# Altium PCB WearTechPCB.PcbDoc
Units mil, origin at the board's own origin, x right, y up, seen from the top; angles counter-clockwise.
Board outline 2037 x 1814 mil, 2 copper layers (Top Layer, Bottom Layer); 100 components, 54 nets, 292 pads, 46 vias.
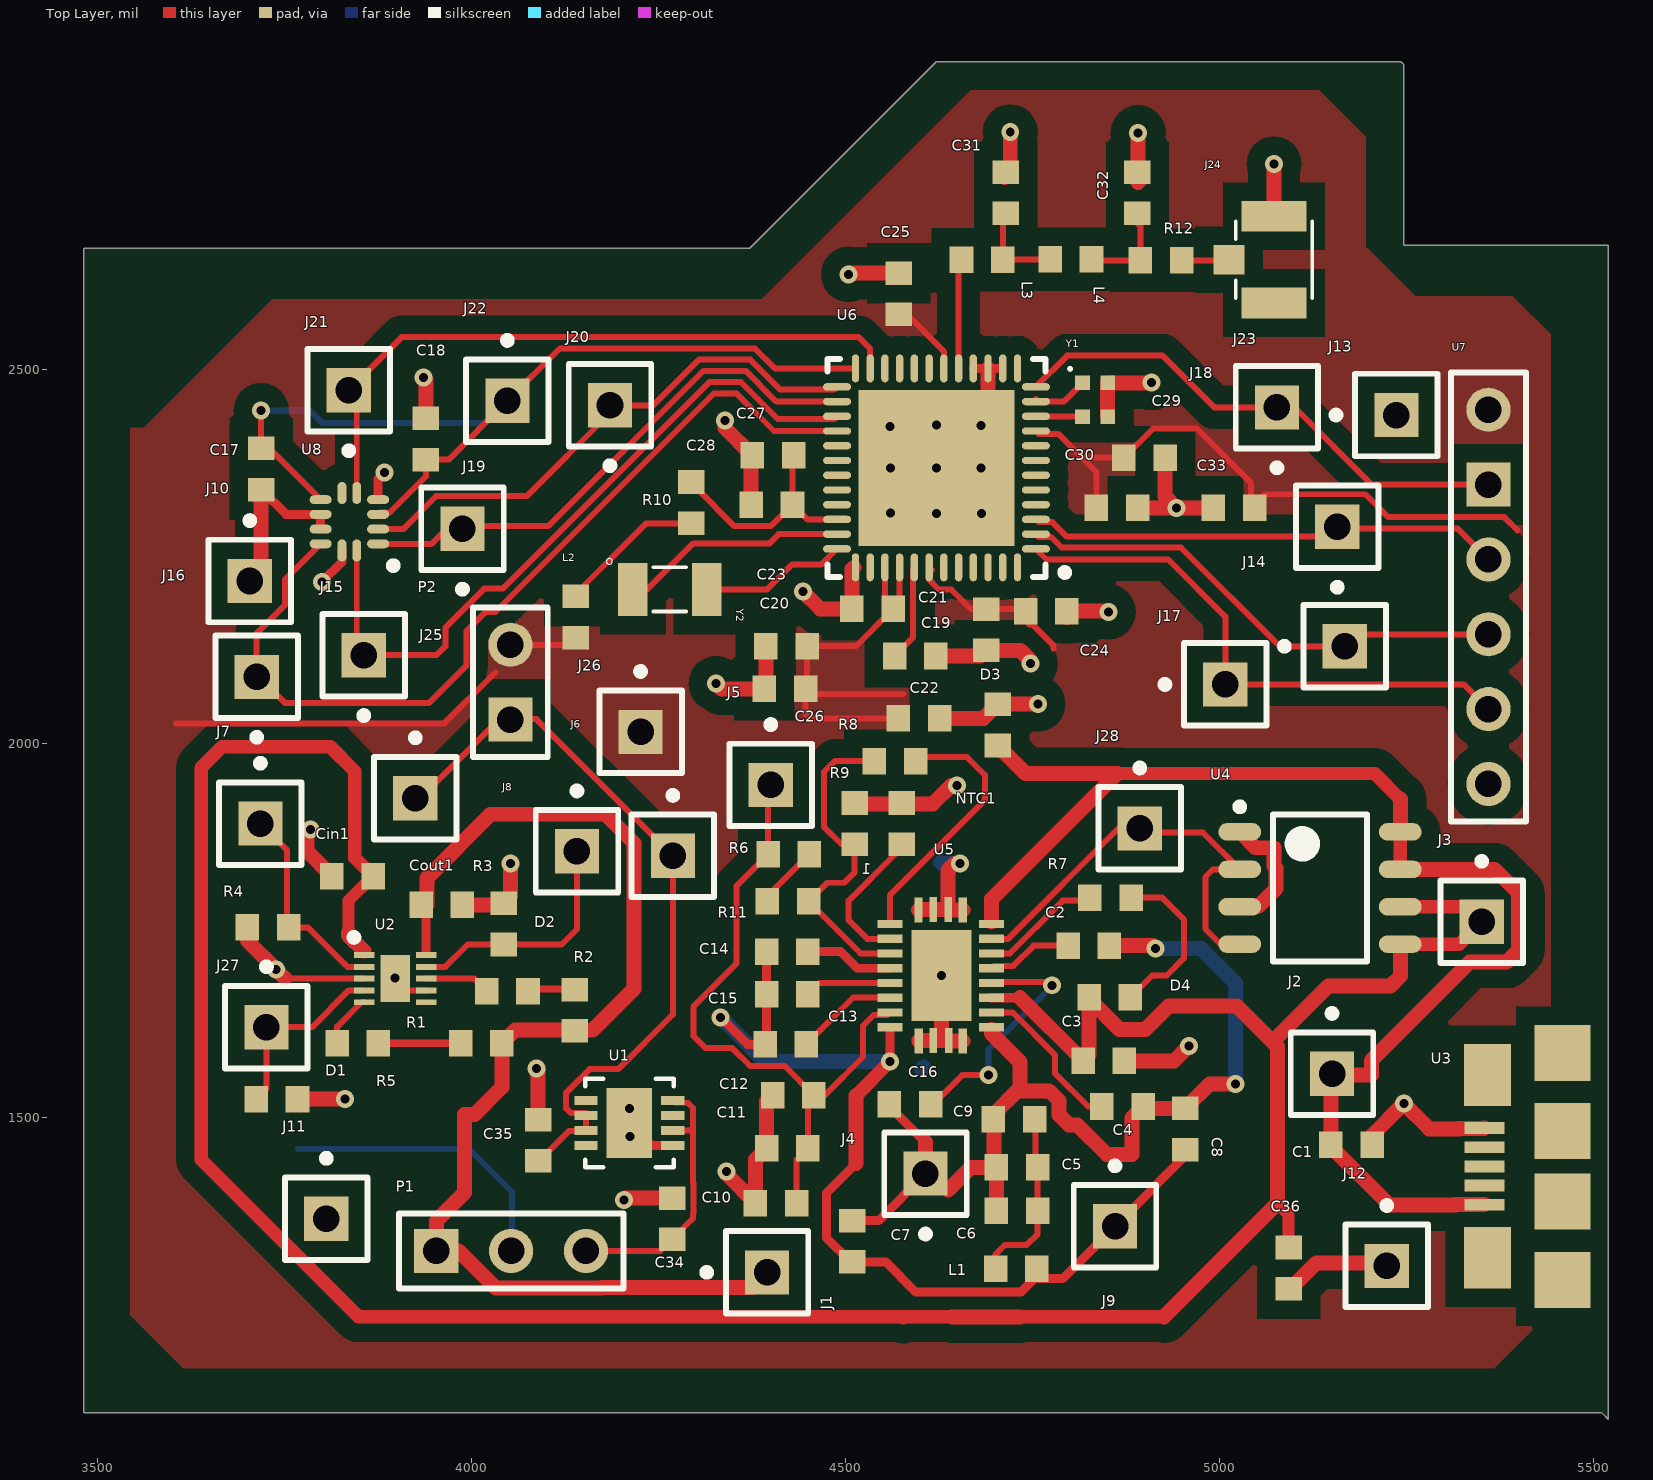
[diagram p0: Top Layer view]
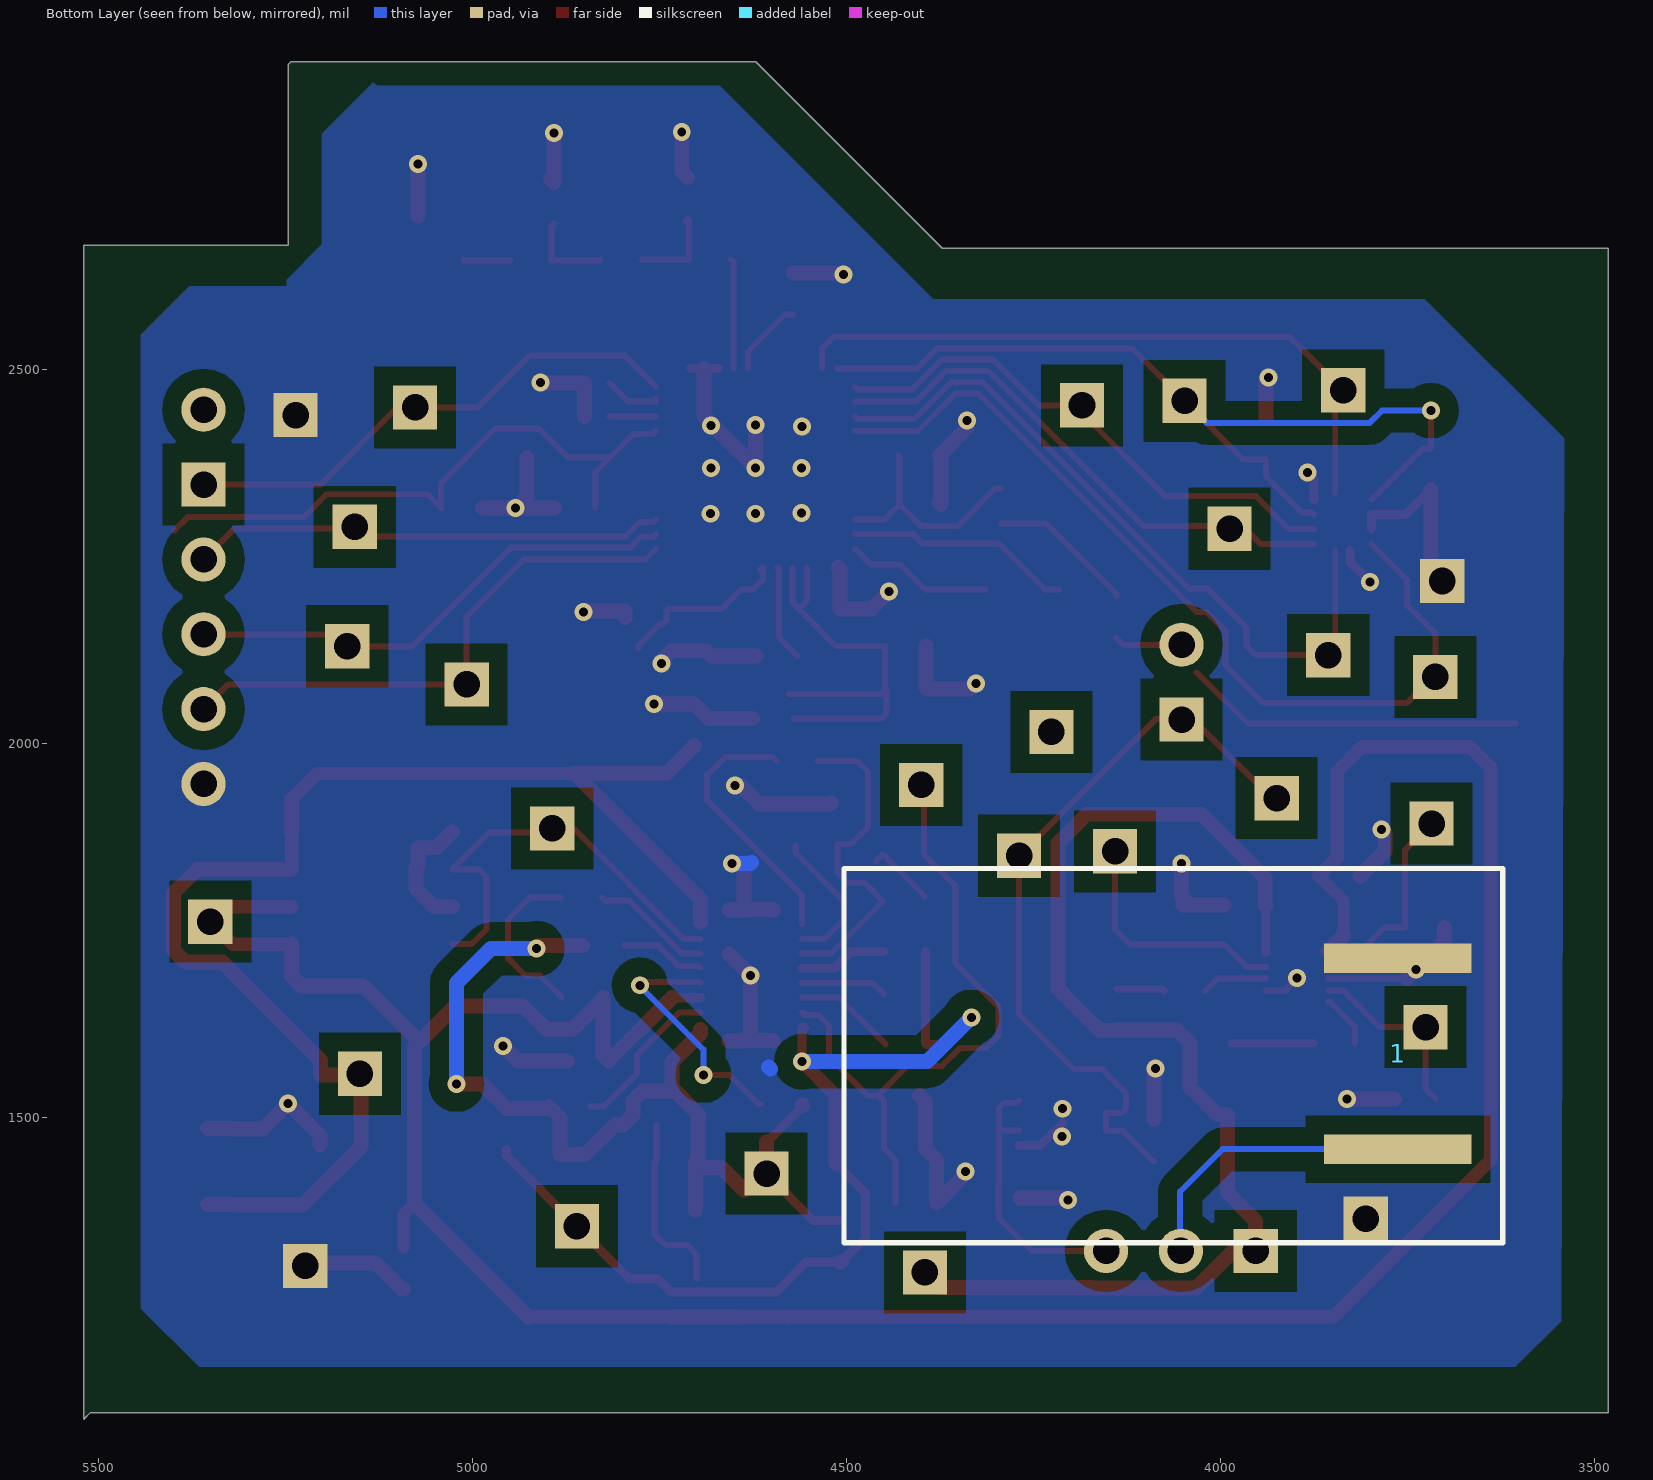
[diagram p1: Bottom Layer view, seen from below]

## Layer stack, top to bottom
Top Solder: solder mask 0.4, Solder Resist, Dk 3.5
Top Layer: signal copper 1.4
Dielectric 1: dielectric 12.6, FR-4, Dk 4.8
Bottom Layer: signal copper 1.4
Bottom Solder: solder mask 0.4, Solder Resist, Dk 3.5

## Board outline
3482,2662 4372,2662 4621,2911 5242,2911 5246,2907 5246,2666 5519,2666 5519,1097 5510,1106 3482,1106

## Design rules (kind name [scope] priority, off if disabled: settings)
Clearance U2 [InComponent('U2') vs InComponent('U2')] p1: gap=10 ignorepadtopadclearanceinfootprint=TRUE except(0: Arc-Hole Track-Hole SMDPad-Hole THPad-Hole Via-Hole Fill-Hole Poly-Hole Region-Hole Text-Hole; 4: Track-Track Track-SMDPad Track-THPad SMDPad-THPad THPad-THPad; 8: Arc-SMDPad SMDPad-SMDPad; 15: Track-Via SMDPad-Via THPad-Via Via-Via; 20: Arc-Via; 25: Arc-Poly Track-Poly SMDPad-Poly THPad-Poly Via-Poly Fill-Poly Poly-Poly)
Clearance Clearance_1 [InComponent('U6') vs InComponent('U6')] p2: gap=10 ignorepadtopadclearanceinfootprint=TRUE except(0: Arc-Hole Track-Hole SMDPad-Hole THPad-Hole Via-Hole Fill-Hole Poly-Hole Region-Hole Text-Hole; 7: Track-Track Track-SMDPad; 8: Arc-SMDPad SMDPad-SMDPad; 15: Track-Via SMDPad-Via THPad-Via Via-Via; 20: Arc-Via; 25: Arc-Poly Track-Poly SMDPad-Poly THPad-Poly Via-Poly Fill-Poly Poly-Poly)
Clearance IC_Pin_Clear [InComponent('U5')Or  InComponent('U1') vs InComponent('U5')Or  InComponent('U1')] p3: gap=10 ignorepadtopadclearanceinfootprint=TRUE except(0: Arc-Hole Track-Hole SMDPad-Hole THPad-Hole Via-Hole Fill-Hole Poly-Hole Region-Hole Text-Hole; 2: SMDPad-Region THPad-Region; 5: Arc-Region Track-Track Track-SMDPad Track-THPad Track-Region; 6: SMDPad-SMDPad; 8: Arc-SMDPad SMDPad-THPad THPad-THPad Poly-Region; 15: SMDPad-Via THPad-Via; 20: Arc-Via Track-Via Via-Via; 25: Arc-Poly Track-Poly SMDPad-Poly THPad-Poly Via-Poly Fill-Poly Poly-Poly)
Clearance [All] p4: gap=10 ignorepadtopadclearanceinfootprint=TRUE except(0: Arc-Hole Track-Hole SMDPad-Hole THPad-Hole Via-Hole Fill-Hole Poly-Hole Region-Hole Text-Hole; 7: Track-Track Track-SMDPad; 8: Arc-SMDPad SMDPad-SMDPad; 20: Arc-Via Track-Via SMDPad-Via THPad-Via Via-Via; 25: Arc-Poly Track-Poly SMDPad-Poly THPad-Poly Via-Poly Fill-Poly Poly-Poly)
MinimumSolderMaskSliver MinimumSolderMaskSliver_1 [(InComponent('U5') OR InComponent('U6') OR InComponent('U2') OR InComponent('U1')  OR InComponent('U3') OR InComponent('U8')  OR InComponent('J24')OR InComponent('Y1')) vs (InComponent('U5') OR InComponent('U6') OR InComponent('U2') OR InComponent('U1')  OR InComponent('U3') OR InComponent('U8')  OR InComponent('J24')OR InComponent('Y1'))] p1: minsoldermaskwidth=1.77
MinimumSolderMaskSliver [All] p2: minsoldermaskwidth=10
PlaneConnect [HasFootprint('QFN50P700X700X90_HS-49N')] p1 off: planeconnectstyle=NoConnect reliefexpansion=20 reliefentries=4 reliefconductorwidth=10 reliefairgap=10
PlaneConnect PlaneConnect_1 [All] p2: planeconnectstyle=Relief reliefexpansion=20 reliefentries=4 reliefconductorwidth=10 reliefairgap=10
PolygonConnect [All] p1: connectstyle=Direct reliefconductorwidth=10 reliefentries=4 polygonreliefangle="90 Angle" airgapwidth=10
RoutingVias [All] p1: holewidth=12 width=24 viastyle="Through Hole" minholewidth=10 minwidth=20 maxholewidth=14 maxwidth=28
SilkToSolderMaskClearance [InComponent('U1')Or  InComponent('Y2') Or InComponent('Y1')Or  InComponent('U2') Or InComponent('J24')Or  InComponent('P1')Or  InComponent('J1') Or InComponent('J11')Or InComponent('J8') Or InComponent('J6')] p1: minsilkscreentomaskgap=2 clearancetoexposedcopper=TRUE
SilkToSolderMaskClearance SilkToSolderMaskClearance_1 [IsPad] p2: minsilkscreentomaskgap=10 clearancetoexposedcopper=TRUE
SolderMaskExpansion [All] p1: expansion=4
Width Power [(InNet('+5V') OR InNet('GND') OR InNet('VBUS') OR InNet('VIN') OR InNet('SOURCE1') OR InNet('BAT2')OR InNet('NetC2_2') OR InNet('NetC7_2'))] p1: maxlimit=20 minlimit=8 preferedwidth=20
Width Signal [All] p2: maxlimit=12 minlimit=8 preferedwidth=8
27 further rules are at their usual default settings.

## Components (designator, comment, footprint, x,y, rotation, side; value= is the part's Value field where it differs from the comment)
1 "SolderPad" BATTERY_CONNECTION 3773,1608 r180 bottom
C1 "Cap" 1608[0603] 5176,1464 r180 top value=1uF
C2 "Cap" 1608[0603] 4825,1730 r0 top value=22nF
C3 "Cap" 1608[0603] 4844.94,1575.97 r0 top value=10uF
C4 "Cap" 1608[0603] 4870,1515 r0 top value=10nF
C5 "Cap" 1608[0603] 4729,1434 r0 top value=68nF
C6 "Cap" 1608[0603] 4729,1376 r0 top value=47nF
C7 "Cap" 1608[0603] 4509,1335 r270 top value=2.2nF
C8 "Cap" 1608[0603] 4954,1485 r270 top value=100pF
C9 "Cap" 1608[0603] 4725,1498 r0 top value=39nF
C10 "Cap" 1608[0603] 4407,1386 r180 top value=10uF
C11 "Cap" 1608[0603] 4422,1459 r180 top value=0.1uF
C12 "Cap" 1608[0603] 4430,1530 r180 top value=10uF
C13 "Cap" 1608[0603] 4420,1598 r180 top value=10nF
C14 "Cap" 1608[0603] 4422,1722 r180 top value=22nF
C15 "Cap" 1608[0603] 4422,1664.74 r180 top value=0.47uF
C16 "Cap" 1608[0603] 4586,1518 r180 top value=0.47uF
C17 "Cap" 1608[0603] 3719,2367 r90 top value=100nF
C18 "Cap" 1608[0603] 3939,2407 r270 top value=100nF
C19 "Cap" 1608[0603] 4593,2117 r180 top value=1uF
C20 "Cap" 1608[0603] 4421,2130.26 r0 top value=0.1uF
C21 "Cap" 1608[0603] 4688,2152 r90 top value=10uF
C22 "Cap" 1608[0603] 4598,2033.75 r180 top value=0.1uF
C23 "Cap" 1608[0603] 4536,2180 r0 top value=10uF
C24 "Cap" 1608[0603] 4768,2177 r180 top
C25 "Cap" 1608[0603] 4571,2601 r270 top value=220nF
C26 "Cap" 1608[0603] 4419,2073 r0 top value=10pF
C27 "Cap" 1608[0603] 4403,2385 r0 top value=10nF
C28 "Cap" 1608[0603] 4401.42,2319.42 r0 top value=10uF
C29 "Cap" 1608[0603] 4899.44,2382 r180 top value=220nF
C30 "Cap" 1608[0603] 4862.56,2315 r180 top value=10pF
C31 "Cap" 1608[0603] 4714,2736 r270 top value=2.0pF
C32 "Cap" 1608[0603] 4890,2736 r270 top value=1.0pF
C33 "Cap" 1608[0603] 5019,2315 r0 top value="0.1 uF"
C34 "Cap" 1608[0603] 4268,1365 r90 top value=10uF
C35 "Cap" 1608[0603] 4089,1470 r90 top value=10uF
C36 "Cap" 1608[0603] 5092,1299 r270 top value=0.1uF
Cin1 "Cap" 1608[0603] 3841,1823 r180 top value=1uF
Cout1 "Cap" 1608[0603] 3960.35,1784.44 r0 top value=10uF
D1 "LED0" 1608[0603] 3848,1599.44 r180 top
D2 "LED0" 1608[0603] 4048,1669.31 r180 top
D3 "Diode" 1608[0603] 4703,2025 r90 top
D4 "LED0" 1608[0603] 4852.94,1660.97 r0 top
J1 "Socket" PIN1 4395,1293.31 r90 top
J2 "Socket" PIN1 5150,1558.69 r0 top
J3 "Socket" PIN1 5349.94,1761.97 r0 top
J4 "Socket" PIN1 4606.69,1425.28 r180 top
J5 "Socket" PIN1 4400,1944.69 r0 top
J6 "Socket" PIN1 4269.12,1850 r0 top
J7 "Socket" PIN1 3718,1893 r0 top
J8 "Socket" PIN1 4141,1856 r0 top
J9 "Socket" PIN1 4860,1355 r0 top
J10 "Socket" PIN1 3703.82,2217.23 r0 top
J11 "Socket" PIN1 3806,1365 r0 top
J12 "Socket" PIN1 5223,1302 r0 top
J13 "Socket" PIN1 5236,2439 r90 top
J14 "Socket" PIN1 5167,2130 r90 top
J15 "Socket" PIN1 3856,2118.11 r180 top
J16 "Socket" PIN1 3713,2089.11 r180 top
J17 "Socket" PIN1 5007.38,2079 r90 top
J18 "Socket" PIN1 5157,2289.62 r180 top
J19 "Socket" PIN1 3988,2287 r180 top
J20 "Socket" PIN1 4185.12,2452 r180 top
J21 "Socket" PIN1 3836,2472 r180 top
J22 "Socket" PIN1 4048,2458 r0 top
J23 "Socket" PIN1 5076.38,2449.23 r180 top
J24 "U.FL-R-SMT-(10)" "Antenna Connector" 5072.42,2646.58 r270 top
J25 "Socket" PIN1 3925,1927 r0 top
J26 "Socket" PIN1 4226,2015.62 r0 top
J27 "Socket" PIN1 3726,1621 r0 top
J28 "Socket" PIN1 4893,1886.69 r0 top
L1 "Inductor" 1608[0603] 4728,1298 r180 top value=10mH
L2 "Ferrite_Bead" 1608[0603] 4139.57,2169 r270 top
L3 "Inductor" 1608[0603] 4682.42,2646.58 r0 top value=1.8nH
L4 "Inductor" 1608[0603] 4801,2647 r0 top value=3.0nH
NTC1 "Res Thermal" 1608[0603] 4575,1893 r90 top value=10k
P1 "Header 3" HDR1X3 3953,1322 r0 top
P2 "Header 2" HDR1X2 4052,2032 r90 top
R1 "Res1" 1608[0603] 4013,1599.44 r0 top value=1.5K
R2 "Res1" 1608[0603] 4138,1643.72 r90 top value=1.5K
R3 "Res1" 1608[0603] 4043.19,1759 r270 top value=250K
R4 "Res1" 1608[0603] 3728,1754.44 r180 top value=12k
R5 "Res1" 1608[0603] 3740,1525 r0 top value=2K
R6 "Res1" 1608[0603] 4424,1852 r0 top value=10K
R7 "Res1" 1608[0603] 4854,1794 r180 top value=1.5K
R8 "Res1" 1608[0603] 4565.94,1976.49 r180 top value=66
R9 "Res1" 1608[0603] 4512,1893 r90 top value=196
R10 "Res1" 1608[0603] 4293.42,2321.94 r270 top value=1ohm
R11 "Res1" 1608[0603] 4422.94,1788.97 r180 top value=10K
R12 "Res1" 1608[0603] 4921.42,2645.58 r180 top value=0
U1 "LT1965EDD-2.5PBF" LT1965 4211,1493 r0 top
U2 "BQ24040" BQ24040 3898,1685.85 r0 top
U3 "MICRO_USB" "MICRO USB" 5515,1435 r90 top
U4 "TPS1120_D_8" BLOCKSWITCH 5133.94,1806.97 r0 top value=Value
U5 "BQ51013B" BQ51013B 4698.94,1597.97 r90 top
U6 "MCU" QFN50P700X700X90_HS-49N 4621.42,2368.42 r180 top
U7 "DEBUG HEADER" HDR1X6 5359,1946 r90 top
U8 "BMA280" QFN50P200X200X100-12N 3836.86,2296.42 r180 top
Y1 "X1" X1 4833.42,2459.42 r0 top
Y2 "X2" X2 4267,2208 r0 top

## Footprints (in the part's own frame and the unit in brackets; to place one, negate y for a bottom-side part, rotate by r counter-clockwise, add the part's x,y. Pads: shape width x height; smd on the part's side, far side on the other; paste and mask are expansions set on the pad)
1608[0603] [mm] "Chip Capacitor, Body 1.6x0.8mm, IPC High Density"
  rect 0.8x0.9 smd: 1(-0.7,0) 2(0.7,0)
  body extent -0.87,-0.48 0.87,0.48, height 1.3
"Antenna Connector" [mm]
  rect 1.05x2.2 smd: GND1(-1.475,0) GND2(1.475,0)
  rect 1x1.05 smd: SIG(0,-1.525)
  silkscreen extent -1.3,-1.3 1.3,1.3
BATTERY_CONNECTION [mm]
  rect 5x1 smd: 1(0.254,-3.81) 2(0.254,2.667)
  silkscreen extent -18.54,-6.98 3.81,5.72
BLOCKSWITCH [mm] "SOIC, 8-Leads, Body 4.90x3.90mm, Pitch 1.27mm, IPC Medium Density"
  oval 1.45x0.6 smd: 1(-2.725,1.905) 2(-2.725,0.635) 3(-2.725,-0.635) 4(-2.725,-1.905) 5(2.725,-1.905) 6(2.725,-0.635) 7(2.725,0.635) 8(2.725,1.905)
  silkscreen extent -2.85,-2.5 1.6,2.88, body extent -2,-2.5 2,2.5, height 1.75
BQ24040 [mm]
  rect 0.7x0.2 smd mask+0.05: 1(-1.05,0.8) 2(-1.05,0.4) 3(-1.05,0) 4(-1.05,-0.4) 5(-1.05,-0.8) 6(1.05,-0.8) 7(1.05,-0.4) 8(1.05,0) 9(1.05,0.4) 10(1.05,0.8)
  rect 1x1.6 smd: 11(0,0)
  silkscreen extent -1.52,1.28 -1.27,1.52
BQ51013B [mm]
  rect 0.85x0.28 smd mask+0.05: 1(0.113,1.074) 10(4.56,1.076) 11(4.56,2.576) 20(0.113,2.571)
  rect 0.28x0.85 smd mask+0.05: 2(0.585,0.1) 3(1.085,0.1) 4(1.585,0.1) 5(2.085,0.1) 6(2.585,0.1) 7(3.085,0.1) 8(3.585,0.1) 9(4.085,0.1) 12(4.085,3.55) 13(3.585,3.55) 14(3.085,3.55) 15(2.585,3.55) 16(2.085,3.55) 17(1.585,3.55) 18(1.085,3.55) 19(0.585,3.55)
  rect 0.85x0.25 smd mask+0.05: 21(0.127,2.083) 22(0.127,1.549) 23(4.572,2.083) 24(4.572,1.575)
  rect 3.099x2.032 smd mask+0.05: 21(2.337,1.803)
HDR1X2 [mm] "Connector; Header; 2 Position"
  rect 1.5x1.5 hole 0.9: 1(0,0)
  round 1.5 hole 0.9: 2(2.54,0)
  silkscreen extent -1.27,-1.27 3.81,1.27
HDR1X3 [mm] "Connector; Header; 3 Position"
  rect 1.5x1.5 hole 0.9: 1(0,0)
  round 1.5 hole 0.9: 2(2.54,0) 3(5.08,0)
  silkscreen extent -1.27,-1.27 6.35,1.27
HDR1X6 [mm] "Connector; Header; 6 Position"
  rect 1.5x1.5 hole 0.9: 1(10.16,0)
  round 1.5 hole 0.9: 2(2.54,0) 3(5.08,0) 4(7.62,0) 5(12.7,0) 6(0,0)
  silkscreen extent -1.27,-1.27 13.97,1.27
LT1965 [mil]
  rect 31x12 smd: 1(-58,30) 2(-58,10) 3(-58,-10) 4(-58,-30) 5(58,-30) 6(58,-10) 7(58,10) 8(58,30)
  rect 61x94 smd: 9(0,0)
  silkscreen extent -59,-59 59,59
"MICRO USB" [mm]
  rect 0.4x1.35 smd: 1(-1.3,4.1) 2(-0.65,4.1) 3(0,4.1) 4(0.65,4.1) 5(1.3,4.1)
  rect 1.9x1.9 smd: M1(-1.2,1.45) M2(1.2,1.45) S1(-3.85,1.45) S2(3.85,1.45)
  rect 2.1x1.6 smd: S3(-3.1,4) S4(3.1,4)
PIN1 [mm] "Connector; Plug"
  rect 1.5x1.5 hole 0.9: 1(0,0)
  silkscreen extent -1.4,-1.4 1.4,2.17
QFN50P200X200X100-12N [mm] "QFN, 12-Leads, Body 2.00x2.00mm, Pitch 0.50mm, IPC Medium Density"
  oval 0.75x0.3 smd: 1(-0.975,0.75) 2(-0.975,0.25) 3(-0.975,-0.25) 4(-0.975,-0.75) 7(0.975,-0.75) 8(0.975,-0.25) 9(0.975,0.25) 10(0.975,0.75)
  oval 0.3x0.75 smd: 5(-0.25,-0.975) 6(0.25,-0.975) 11(0.25,0.975) 12(-0.25,0.975)
  silkscreen extent -1.62,1.37 -1.37,1.61, body extent -1.04,-1.04 1.04,1.04, height 1
QFN50P700X700X90_HS-49N [mm] "QFN, 48-Leads, Body 7.00x7.00mm, Pitch 0.50mm, Thermal Pad 5.30x5.30mm, IPC Medium Density"
  rect 5.3x5.3 smd: 0(0,0)
  oval 0.95x0.25 smd: 1(-3.375,2.75) 2(-3.375,2.25) 3(-3.375,1.75) 4(-3.375,1.25) 5(-3.375,0.75) 6(-3.375,0.25) 7(-3.375,-0.25) 8(-3.375,-0.75) 9(-3.375,-1.25) 10(-3.375,-1.75) 11(-3.375,-2.25) 12(-3.375,-2.75) 25(3.375,-2.75) 26(3.375,-2.25) 27(3.375,-1.75) 28(3.375,-1.25) 29(3.375,-0.75) 30(3.375,-0.25) 31(3.375,0.25) 32(3.375,0.75) 33(3.375,1.25) 34(3.375,1.75) 35(3.375,2.25) 36(3.375,2.75)
  oval 0.25x0.95 smd: 13(-2.75,-3.375) 14(-2.25,-3.375) 15(-1.75,-3.375) 16(-1.25,-3.375) 17(-0.75,-3.375) 18(-0.25,-3.375) 19(0.25,-3.375) 20(0.75,-3.375) 21(1.25,-3.375) 22(1.75,-3.375) 23(2.25,-3.375) 24(2.75,-3.375) 37(2.75,3.375) 38(2.25,3.375) 39(1.75,3.375) 40(1.25,3.375) 41(0.75,3.375) 42(0.25,3.375) 43(-0.25,3.375) 44(-0.75,3.375) 45(-1.25,3.375) 46(-1.75,3.375) 47(-2.25,3.375) 48(-2.75,3.375)
  silkscreen extent -4.47,-3.7 3.7,3.7, body extent -3.55,-3.55 3.55,3.55, height 0.9
X1 [mm]
  rect 0.5x0.5 smd: 1(-0.425,0.575) 2(-0.425,-0.575) 3(0.425,-0.575) 4(0.425,0.575)
  silkscreen extent -0.9,1 -0.8,1.1, body extent -0.85,-0.65 0.85,0.65, height 0.65
X2 [mm]
  rect 1x1.8 smd: 1(-1.301,-0.051) 2(1.199,-0.051)
  silkscreen extent -2.2,-0.8 0.5,1

## Part data
C1 C2 C3 C4 C5 C6 C7 C8 C9 C10 C11 C12 C13 C14 C15 C16 C17 C18 C19 C20 C21 C22 C23 C24 C25 C26 C27 C28 C29 C30 C31 C32 C33 C34 C35 C36 Cin1 Cout1: "Capacitor"
  C1: Link=http://psearch.en.murata.com/browser/nosupport/?return=capacitor/product/GRM188R61E105KAAD%23.html
  C2: LatestRevisionDate=17-Jul-2002, LatestRevisionNote="Re-released for DXP Platform.", Link=http://psearch.en.murata.com/capacitor/product/GRM188B11E223MA01%23.html, PackageDescription="Radial Cap, Thru-Hole; 2 Leads; 0.3 in Pin Spacing", PackageReference=RAD-0.3, Published=8-Jun-2000, Publisher="Altium Limited"
  C3 C5 C6 C7 C8 C9 C10 C11 C12 C13 C14 C15 C16 C17 C18 C19 C20 C21 C22 C23 C25 C26 C27 C28 C29 C30 C31 C32 C33 C34 C35 C36 Cin1 Cout1: LatestRevisionDate=17-Jul-2002, LatestRevisionNote="Re-released for DXP Platform.", PackageDescription="Radial Cap, Thru-Hole; 2 Leads; 0.3 in Pin Spacing", PackageReference=RAD-0.3, Published=8-Jun-2000, Publisher="Altium Limited"
  C4: LatestRevisionDate=17-Jul-2002, LatestRevisionNote="Re-released for DXP Platform.", Link=http://psearch.en.murata.com/capacitor/product/GRM185R61E105MA12%23.html, PackageDescription="Radial Cap, Thru-Hole; 2 Leads; 0.3 in Pin Spacing", PackageReference=RAD-0.3, Published=8-Jun-2000, Publisher="Altium Limited"
  C24: Ciovdd1=0.1uF, LatestRevisionDate=17-Jul-2002, LatestRevisionNote="Re-released for DXP Platform.", PackageDescription="Radial Cap, Thru-Hole; 2 Leads; 0.3 in Pin Spacing", PackageReference=RAD-0.3, Published=8-Jun-2000, Publisher="Altium Limited"
D1 D2 D4: "Typical INFRARED GaAs LED", LatestRevisionDate=08-Jul-2005, LatestRevisionNote="Mech Layer 1 removed.", PackageDescription="LED; 2 Leads", PackageReference=LED-0, Published=8-Jun-2000, Publisher="Altium Limited"
D3: "Default Diode", Link=https://www.digikey.com/product-detail/en/SMF05CT1G/SMF05CT1GOSCT-ND/1967287
NTC1: "Thermistor", Code_IPC=RESC2012, LatestRevisionDate=29-May-2009, LatestRevisionNote="IPC-7351 Footprint Added.", PackageDescription="Chip Resistor 0805 Case Size", PackageReference=6-0805, PackageVersion=Mar-2003, Published=24-Mar-1999, Publisher="Altium Limited"
P1: "Header, 3-Pin", LatestRevisionDate=17-Jul-2002, LatestRevisionNote="Re-released for DXP Platform.", Publisher="Altium Limited"
P2: "Header, 2-Pin", LatestRevisionDate=17-Jul-2002, LatestRevisionNote="Re-released for DXP Platform.", Publisher="Altium Limited"
R1 R2 R3 R4 R5 R6 R7 R8 R9 R10 R11 R12: "Resistor", LatestRevisionDate=17-Jul-2002, LatestRevisionNote="Re-released for DXP Platform.", PackageDescription="Axial Device, Thru-Hole; 2 Leads; 0.3 in Pin Spacing", PackageReference=AXIAL-0.3, Published=8-Jun-2000, Publisher="Altium Limited"
U1: "PMIC - LDO voltage regulator Linear Technology LT1965EDD-2.5#PBF Positive, fixed DFN 8 (3x3)", Package="DFN-8 Linear Technology", Availability=Warning, MF="Linear Technology", MP=LT1965EDD-2.5#PBF, Price="2.66 USD"
U4: Manufacturer="Texas Instruments", Manufacturer_Part_Number=tps1120_d_8, PACKAGE_DESIGNATOR=D, Datasheet_URL=http://www.ti.com/lit/gpn/TPS1120, FAMILY_NAME="PMOS SWITCH", GENERIC_PART_NUMBER=TPS1120, INDUSTRY_STD_PKG_TYPE=SOIC, PIN_COUNT=8, RefDes=RefDes, Type=Type, Vendor="Texas Instruments"
J1 J2 J3 J4 J5 J6 J7 J8 J9 J10 J11 J12 J13 J14 J15 J16 J17 J18 J19 J20 J21 J22 J23 J25 J26 J27 J28: LatestRevisionDate=17-Jul-2002, LatestRevisionNote="Re-released for DXP Platform.", Publisher="Altium Limited"
L1 L3 L4: Code_IEC=1005, Code_JEITA=0402, LatestRevisionDate=29-May-2009, LatestRevisionNote="IPC-7351 Footprint Added.", PackageDescription="Chip Inductor", PackageReference=0402-A, Published=8-Jun-2000, Publisher="Altium Limited"

## Via types
v1: diameter 24, hole 12, Top Layer to Bottom Layer, 46 vias

## Nets (pads, with @x,y where several pads share a name; then routed paths per layer and width w, separated by ;. In a path a pad name is that pad's centre, name@x,y a point inside that pad or via, vN(x,y) a via of type N, cw(c..) or ccw(c..) an arc to the next point about the centre after c; other vN are vias at no path point)
BAT: 1.1 P1.2 | length 389.3
  Bottom Layer w8: 1.1@3768,1458 3997.44,1458 4054,1401.44 4054,1323 P1.2
BAT2: Cout1.1 J1.1 P1.1 R1.2 R2.1 U2.10 | length 1622
  Top Layer w12.01: U2.10@3939.34,1720.94 Cout1.1@3939.34,1783.34
  Top Layer w20: Cout1.1@3939.34,1783.34 3940.44,1784.44 3940.44,1820.44 4025.53,1905.53 4178.81,1905.53 4217,1867.34 4217,1672 4161.88,1616.88 4138,1616.88 4137.88,1617 4058.12,1617 R1.2 4040.56,1540.56 4004,1504 3991,1504 3991,1400 3953,1362 P1.1 3982.96,1322 4032.49,1272.47 4173.52,1272.47 4174.04,1273 4374.69,1273 J1.1
GATE: J28.1 U4.2 U4.4 U5.8 | length 588.7
  Top Layer w8: U5.8 4717.11,1739.11 4864,1886 4893,1886 4898,1881 4977.62,1881 U4.2 4990.94,1831.97 4980.94,1821.97 4980.94,1751.97 5000.94,1731.97 U4.4
GND: 1.2 C1.1 C3.2 C10.2 C11.2 C12.2 C17.1 C18.1 C19.1 C20.1 C21.1 C22.1 C23.1 C24.1 C25.1 C26.1 C27.1 C28.1 C29.1 C30.1 C31.1 C32.1 C33.1 C34.2 C35.2 C36.2 Cin1.2 Cout1.2 D3.2 J10.1 J11.1 J12.1 J13.1 J24.GND1 NTC1.2 R3.1 R4.2 R5.2 R9.2 U1.5 U1.9 U2.3 U2.7 U2.11 U3.5 U5.1 U5.10 U5.11 U5.20 U5.21 U5.22 U5.23 U5.24 U6.0 U6.14 U6.15 U6.16 U6.37 U7.6 U8.4 U8.8 U8.9 U8.11 Y1.3 Y1.4 | length 3753.4
  Top Layer w8: 3751.15,1685.85 U2.3 ; U2.11@3913.75,1670.1 U2.7
  Top Layer w10: U2.11 U2.11@3913.75,1670.1
  Top Layer w12: C17.1 3752.18,2306.26 U8.8 U8.9 ; v1(3800,2216) 3827.02,2243.02 U8.11 ; U8.4 3875.25,2353.25 v1(3884,2362) ; U1.9 4241,1463 U1.5 ; U6.16 U6.15 U6.14@4707.76,2501.29
  Top Layer w20: R4.2 3700.44,1736.56 v1(3739,1698) 3751.15,1685.85 ; J10.1 3719,2232.4 C17.1 ; R5.2 v1(3831,1525) ; v1(3785,1885) 3780.44,1880.44 3780.44,1856 Cin1.2 ; v1(3936,2489) 3939,2486 C18.1 ; Cout1.2@3995.56,1784.44 R3.1@4049.88,1784.44 ; R3.1 4052,1795.37 v1(4052,1840) ; v1(4087,1566) 4089,1564 C35.2 ; v1(4204,1390) 4206.56,1392.56 C34.2 ; v1(4327,2080) 4334,2073 C26.1 4393.44,2075 C20.1 ; v1(4339,2432) 4339,2421.44 C27.1 4373.86,2383.42 C28.1 C28.1@4375.86,2321.42 ; v1(4341,1428) 4341,1424.44 C10.2 4379.44,1444 C11.2 4394.44,1522 C12.2 ; v1(4443,2203) 4466,2180 C23.1 4508.44,2233.07 U6.37@4510.91,2235.54 ; v1(4504,2627) 4505.56,2628.56 C25.1 ; R9.2@4519.94,1920.53 4520.94,1919.53 4616.5,1919.53 4640.97,1944 v1(4649,1944) ; U5.11 4597.99,1777.97 U5.23 U5.24 ; U5.20 4598.27,1602.97 4616.94,1602.97 U5.22 ; C19.1 4680.56,2117 C21.1 4733.56,2124.44 4747,2111 v1(4747,2107) ; U6.0@4621.42,2411.73 v1(4621.42,2368.42) 4664.73,2411.73 4690.32,2437.32 U6.15 ; C22.1 4684.19,2033.75 D3.2 4756.56,2052.56 v1(4757,2053) ; v1(4653,1840) 4645.87,1840 4636.94,1831.06 U5.24 ; U5.21@4656.57,1718.61 v1(4627.94,1689.97) 4627.94,1612.97 U5.22 ; U5.10 4637.41,1777.5 U5.24 ; U5.1 4638.49,1602.42 U5.22 ; C31.1@4712,2756.12 4720,2764.12 v1(4720,2817) ; C24.1@4795.56,2168.56 C24.1 4850,2177 v1(4851,2176) ; Y1.3 Y1.4 4909.06,2482.06 v1(4908.69,2482.42) ; C3.2 4938.97,1575.97 v1(4959,1596) ; C30.1 v1(4942,2315) ; v1(4891,2816) 4890.58,2815.58 4890.58,2749.98 C32.1@4895.73,2755.12 ; C29.1 4927,2330 v1(4942,2315) ; C33.1@4986.44,2315 v1(4942,2315) ; J24.GND1 v1(5072.42,2774.42) ; C36.2 5094.39,1271.44 5128.95,1306 5219,1306 J12.1 ; C1.1 5203.56,1476.56 v1(5246,1519) 5279.82,1485.18 5319.68,1485.18 5319.97,1485.46 5352.86,1485.46 U3.5
  Bottom Layer w20: 4601.17,1565.17 4604,1568 ; 4627,1841 4628,1840 v1(4653,1840)
  other v1: 4212,1475 4211,1512 3898,1686.85 4621.42,2307.11 4681.73,2307.11 4560.11,2308.11 4560.11,2368.42 4680.73,2368.42 4559.11,2423.73 4680.73,2424.73 4621.42,2425.73
IN: C34.1 P1.3 U1.6 U1.8 | length 369
  Top Layer w8: P1.3 4252.56,1322 C34.1 4296,1365.44 4296,1371.54 4296.72,1372.25 4296.72,1412.86 4296,1413.58 4296,1487 ; U1.6 4292,1483 4296,1487 ; U1.8 4272,1520 4289.06,1520 4296,1513.06 4296,1487
NetC2_1: C2.1 U5.6 | length 115
  Top Layer w8: U5.6 4698.17,1702.91 4724.13,1702.91 4751.21,1730 C2.1
NetC2_2: C2.2 C4.2 C5.1 C6.1 C7.1 C8.1 C9.1 C16.2 J4.1 U5.2 | length 1319
  Top Layer w12: C7.1 4543.96,1362.56 J4.1 ; C16.2@4558.38,1515.58 4606.69,1467.27
  Top Layer w20: C16.2@4558.38,1515.58 C16.2 ; J4.1 4606.69,1467.27 ; 4637.04,1403.44 4666.85,1433.25 4694.66,1433.25 C5.1@4698.38,1436.97 ; U5.2@4695,1618.17 4695,1612.4 4733,1574.4 4733,1539.6 4697.44,1504.05 C9.1 ; C9.1@4698.38,1499.38 C5.1@4698.38,1436.97 ; C6.1 4701.38,1376.06 4701.38,1439.97 C5.1@4698.38,1436.97 ; 4735,1536 4772.07,1536 4785.31,1522.76 4785.31,1503.69 4798.76,1490.24 4809.69,1490.24 4848.94,1451 4882.44,1451 4882.44,1499.88 C4.2 4900,1512.56 C8.1 4986.44,1545 v1(5021,1545) ; C2.2 4910,1730 v1(4914,1726)
  Bottom Layer w20: v1(4914,1726) 4975,1726 5021,1680 v1(5021,1545)
NetC4_1: C4.1 U5.3 | length 213.9
  Top Layer w8: U5.3 4722.96,1640.68 4780,1583.65 4780,1559 4824,1515 C4.1
NetC5_2: C5.2 C6.2 C9.2 L1.2 | length 246.4
  Top Layer w8: L1.2@4700.44,1285 4700.44,1317.44 4713,1330 4742,1330 4756.5,1344.5 4756.5,1439.97 4753.5,1442.97 C9.2@4753.5,1489.97
NetC7_2: C7.2 C8.2 C13.2 C14.2 C15.2 J9.1 L1.1 U5.19 | length 1362.6
  Top Layer w12: v1(4333,1634) 4369,1598 C13.2 4394.44,1600 C15.2 C14.2 ; C7.2@4506.61,1307.44 4474.28,1339.77 4474.28,1399.22 4514,1438.94 ; C7.2 4553.56,1307.44 4594,1267 4734.29,1267 4752.29,1285 4790,1285 J9.1 4954,1449 C8.2 ; U5.19@4556,1620.51 4559.17,1620.51 4559.17,1588.2 v1(4559.17,1574.83)
  Top Layer w18: 4514,1529.65 v1(4559.17,1574.83)
  Top Layer w20: C7.2@4506.61,1307.44 C7.2 ; 4514,1438.94 4514,1529.65
  Bottom Layer w20: v1(4333,1634) 4392.17,1574.83 v1(4559.17,1574.83)
NetC10_1: C10.1 C11.1 C12.1 J5.1 R6.1 U5.18 | length 897
  Top Layer w8: J5.1 4396.44,1941.13 R6.1 4354,1809.56 4354,1705.91 4297,1648.91 4297,1609 4313,1593 4348.42,1593 4372.14,1569.28 4418.27,1569.28 C12.1 ; C10.1 4434.56,1444 C11.1 4449.56,1522 C12.1 ; U5.18 4556,1637.51 4537.88,1637.51 4523.17,1622.8 4523.17,1581.17 4472,1530 C12.1
NetC13_1: C13.1 U5.17 | length 137.4
  Top Layer w8: C13.1 4509.93,1660.37 U5.17
NetC14_1: C14.1 U5.15 | length 118.8
  Top Layer w12: C14.1 4493.42,1722 4515.68,1699.74 U5.15
NetC15_1: C15.1 U5.16 | length 116
  Top Layer w8: C15.1 4464.87,1680.06 U5.16
NetC16_1: C16.1 U5.5 | length 336.5
  Top Layer w8: C16.1 4617,1518 4656,1557 v1(4691,1557) ; U5.5 4696.31,1681.37 4771.63,1681.37 v1(4776,1677) v1@4776,1681.3
  Bottom Layer w8: v1(4691,1557) 4691,1591 4776,1676 v1(4776,1677)
NetC19_2: C19.2 U6.41 | length 129.5
  Top Layer w8: C19.2 4590.31,2141.87 4590.31,2233.96 U6.41
NetC27_2: C27.2 C28.2 R10.1 U6.34 | length 302.6
  Top Layer w8: R10.1@4293.42,2340.98 4300.86,2340.98 4351.42,2290.42 4399.98,2290.42 C28.2 ; C27.2 4428.98,2383.42 C28.2 ; U6.34 4448.88,2299.52 C28.2
NetC31_2: C31.2 L3.2 L4.1 | length 123.8
  Top Layer w8: C31.2@4715.44,2697.56 4712,2701 4709.98,2698.98 L3.2 4710.4,2647 L4.1
NetC32_2: C32.2 L4.2 R12.2 | length 117.3
  Top Layer w8: L4.2 4829.98,2645.58 R12.2 4893.86,2691.58 4890.58,2694.86 C32.2@4891.14,2695.42
NetD1_1: D1.1 R1.1 | length 109.9
  Top Layer w10: D1.1 R1.1
NetD1_2: D1.2 U2.5 | length 72
  Top Layer w8: D1.2 3820.44,1621.72 3853.07,1654.35 U2.5
NetD2_1: D2.1 R2.2 | length 63.5
  Top Layer w10: D2.1@4075.56,1669.44 4078.12,1672 R2.2@4138,1672
NetD2_2: D2.2 U2.8 | length 88
  Top Layer w8: U2.8 4003.91,1685.85 D2.2
NetD4_2: D4.2 R7.1 | length 227.5
  Top Layer w8: D4.2 4909.53,1690 4928.91,1690 4952,1713.09 4952,1765 4923,1794 R7.1
NetJ7_1: J7.1 R4.1 U2.2 | length 278.2
  Top Layer w8: J7.1 3753.69,1857.31 3753.69,1754.44 R4.1 3781.44,1754.44 3830.69,1705.19 3834.28,1701.6 U2.2
NetJ8_1: J8.1 R3.2 U2.9 | length 326.5
  Top Layer w8: U2.9 3965.16,1701.6 3995,1731.44 4120.44,1731.44 4141,1752 J8.1
NetJ14_1: J14.1 U6.2 U7.3 | length 673.4
  Top Layer w8: U6.2 4758.06,2276.07 4774.67,2276.07 4788.74,2262 4948,2262 5080,2130 J14.1 5183,2146 U7.3
NetJ17_1: J17.1 U6.1 U7.2 | length 746.5
  Top Layer w8: U6.1 4768.44,2246 4931,2246 5007.38,2169.62 J17.1 5326,2079 U7.2
NetJ18_1: J18.1 U6.3 U7.4 | length 637.3
  Top Layer w8: U6.3 4758.05,2295.76 4776.19,2295.76 4794.95,2277 5144.38,2277 J18.1 5159.14,2287.47 5317.53,2287.47 U7.4
NetJ23_1: J23.1 U6.12 U7.1 | length 693.4
  Top Layer w8: U6.12 4796.02,2518.42 4923.6,2518.42 4992.79,2449.23 J23.1 5099.77,2449.23 5203,2346 U7.1
NetJ24_SIG: J24.SIG R12.1 | length 63.8
  Top Layer w8: R12.1 5011.38,2645.58 J24.SIG
NetJ27_1: J27.1 R5.1 U2.4 | length 252.6
  Top Layer w8: R5.1 3726,1538.56 J27.1 3787,1621 3836.1,1670.1 U2.4
NetL2_1: L2.1 R10.2 | length 196.9
  Top Layer w8: L2.1@4139,2196.56 4139,2199.89 4233.49,2294.38 R10.2
NetL3_1: L3.1 U6.17 | length 147.9
  Top Layer w8: U6.17 4650.95,2643.61 4654.39,2647.05 L3.1
NetNTC1_1: NTC1.1 U5.13 | length 192.4
  Top Layer w8: U5.13 4528.89,1739.11 4504,1764 4504,1790 4567.94,1853.94 NTC1.1@4567.94,1864.41
NetR6_2: R6.2 R11.2 | length 93.3
  Top Layer w8: R11.2@4395.38,1795.82 R6.2 R6.2@4461.38,1842.18
NetR7_2: R7.2 U5.7 | length 162.3
  Top Layer w8: U5.7 4719.43,1719.43 4790,1790 4822.44,1790 R7.2
NetR8_1: R8.1 U5.12 | length 356.2
  Top Layer w8: U5.12 4559.17,1797.17 4686,1924 4686,1957.91 4661.94,1981.97 4598.49,1981.97 R8.1@4593.49,1976.97
NetR8_2: R8.2 R9.1 R11.1 U5.14 | length 450.1
  Top Layer w8: R8.2@4538.38,1976.97 4485.94,1976.97 4470.94,1961.97 4470.94,1888.97 4494.46,1865.44 R9.1 4512,1828 4498,1814 4475.53,1814 R11.1 4520.04,1719.43 U5.14
NetU6_10: U6.10 Y1.2 | length 62.6
  Top Layer w8: U6.10 4816.15,2437.32 Y1.2
NetU6_11: U6.11 Y1.1 | length 76.5
  Top Layer w8: U6.11@4754.29,2460.76 U6.11 4791.63,2457 Y1.1
NetU6_35: U6.35 Y2.1 | length 303.3
  Top Layer w8: Y2.1 4235,2206 4296.63,2267.63 4398.4,2267.63 4410.61,2279.84 U6.35
NetU6_36: U6.36 Y2.2 | length 196.8
  Top Layer w8: Y2.2 4395.09,2206 4428.09,2239 4467.39,2239 U6.36
SOURCE1: U4.1 U4.3 | length 168.6
  Top Layer w20: U4.3 5050.97,1781.97 5075,1806 5075,1833.62 5072.2,1836.43 5072.2,1860.78 5047.84,1860.78 U4.1
US0_CLK: J15.1 U6.27 U8.12 | length 964.1
  Top Layer w8: U8.12 3846.71,2127.41 J15.1 3953.11,2118.11 3965,2130 3965,2155 4017.06,2207.06 4041.94,2207.06 4317.88,2483 4360.12,2483 4409.57,2433.55 4484.78,2433.55 U6.27
US0_CS: J16.1 U6.28 U8.10 | length 1220.8
  Top Layer w8: U8.10 3750.53,2218.94 3750.53,2184.9 3713,2147.37 3713,2092.11 3751.11,2054 3943,2054 3993.47,2104.47 3993.47,2150.53 4018.97,2176.03 4032.12,2176.03 4324.09,2468 4353.91,2468 4404.28,2417.63 U6.28
US0_INT: J21.1 U6.23 U8.5 | length 900.6
  Top Layer w8: U8.5 3846.71,2461.29 J21.1 3907,2543 4517.52,2543 4532.84,2527.69 U6.23
US0_RX: J19.1 U6.26 U8.1 | length 726
  Top Layer w8: U8.1 3946.89,2266.89 3967,2287 J19.1 3991.5,2290.5 4102.5,2290.5 4310,2498 4366.34,2498 4407.34,2457 U6.26
US0_TX: J20.1 U6.25 U8.2 | length 731.3
  Top Layer w8: U8.2 3908.72,2286.58 3952.67,2330.53 4074,2330.53 4185.12,2441.65 J20.1 4242.79,2452 4303.79,2513 4372.55,2513 4412.63,2472.92 4484.78,2472.92 U6.25
US0_VDD: C17.2 C18.2 J22.1 U6.24 U8.3 U8.7 | length 1260.4
  Top Layer w8: v1(3719,2445) C17.2 3729.86,2394.56 U8.7 ; U8.3 3878.03,2309.04 3891.11,2309.04 3939,2356.93 C18.2 3969.44,2379.44 J22.1 4118,2528 4378.76,2528 4405.47,2501.29 U6.24
  Bottom Layer w8: v1(3719,2445) 3784.15,2445 3800.67,2428.47 4018.47,2428.47 J22.1
VBUS: C1.2 D3.1 J2.1 U3.1 U4.7 U4.8 U5.9 | length 1840.5
  Top Layer w18: 4863,1960 5206.91,1960 5241.22,1925.68 ; U4.7 U4.8
  Top Layer w20: U5.9@4695,1761.62 4695,1792 4863,1960 4740.44,1960 D3.1 ; U4.7 5367.28,1831.97 5399.46,1799.78 5399.46,1724.16 5383.31,1708 5334,1708 5202.44,1576.44 5202.44,1557 5150,1557 5148.44,1555.44 C1.2 5148.44,1461.61 5226.52,1383.54 5314.86,1383.54 5315.15,1383.82 U3.1 ; U4.8 5241.22,1925.68
VCC: C20.2 C21.2 C22.2 C23.2 C24.2 C25.2 C26.2 C29.2 C30.2 C33.2 J26.1 L2.2 P2.2 U6.9 U6.18 U6.39 U6.40 U6.42 U7.5 | length 2343.1
  Top Layer w8: 3605,2027 3964,2027 4032,2095 ; P2.2@4037,2134 P2.2@4044.44,2141.44 ; P2.2 4130.13,2132 L2.2 ; U6.39 4552.52,2191.04 C23.2 ; C22.2 4452.25,2033.75 4446.56,2039.44 C26.2 ; C25.2 4582,2573.44 4631.26,2524.18 U6.18 ; U6.40 4572.21,2188.65 C23.2 ; 4577,2066.28 4453.28,2066.28 C26.2 ; U6.42@4615.34,2231.78 U6.42 4611.58,2218.93 4624.67,2205.84 4641.28,2205.84 4667.56,2179.56 C21.2 4737.88,2179.56 C24.2 4740.44,2164.56 4746,2159 4749.91,2159 4778,2130.91 4778,2127 ; U6.9 4758.05,2413.87 4783.99,2413.87 4815.86,2382 ; C30.2 4835,2362.86 4815.86,2382 ; 5397.89,2284.89 5380.31,2302.47 5225.31,2302.47 5194.64,2333.14 5059.7,2333.14 5041.56,2315 5041.56,2348.44 4969,2421 4910.88,2421 C29.2 4815.86,2382 ; C26.2 4448.56,2075 C20.2 4513.81,2130.26 C23.2
VIN: C3.1 C36.1 Cin1.1 D4.1 J3.1 U2.1 U4.5 U4.6 U5.4 | length 3920.6
  Top Layer w12.2: U5.4 4732.98,1660.37
  Top Layer w16: 3835.56,1747.23 3835.56,1790 Cin1.1 ; 5077,1385.66 5092,1370.66 C36.1
  Top Layer w18: Cin1.1 3844,1847.56 3844,1963 3811,1996 3667,1996 3639,1968 3639,1444 3849,1234 4641.87,1234 ; 4576.76,1232.47 4577.28,1233 ; 4733.82,1234 4925.34,1234 ; U4.5 5319.94,1731.97 J3.1 5329.94,1781.97 U4.6
  Top Layer w20: 3835.56,1747.23 3835.56,1743.64 3856.6,1722.6 ; 4641.87,1234 4733.82,1234 ; 4732.98,1660.37 C3.1 4825.38,1583.97 D4.1@4825.38,1658.58 ; D4.1 D4.1@4825.38,1658.58 ; 4925.34,1234 5077,1385.66 5077,1595 5023,1649 4931.6,1649 4900.57,1617.97 4865.99,1617.97 D4.1@4825.38,1658.58 ; 5075.48,1606.48 5145,1676 5228,1676 5241.22,1689.22 U4.5
Vout: C35.1 J6.1 J25.1 P2.1 U1.2 U1.3 | length 1020.2
  Top Layer w8: J25.1 3931.5,1927 4037,2032.5 4086.62,2032.5 J6.1 ; C35.1 4090.44,1442.44 4130.44,1482.44 4152.44,1482.44 U1.3 U1.2 4153,1506 4132.94,1506 4126.5,1512.44 4126.5,1533.56 4157.94,1565 4196,1565 4269,1638 4269,1845 J6.1@4262,1852
pads on no net: J24.GND2 U1.1 U1.4 U1.7 U2.6 U3.2 U3.3 U3.4 U3.M1 U3.M2 U3.S1 U3.S2 U3.S3 U3.S4 U6.4 U6.5 U6.6 U6.7 U6.8 U6.13 U6.19 U6.20 U6.21 U6.22 U6.29 U6.30 U6.31 U6.32 U6.33 U6.38 U6.43 U6.44 U6.45 U6.46 U6.47 U6.48 U8.6

## Polygon pours and split planes (outlines as drawn)
GND on Bottom Layer "GND" (solid, remove dead copper, pour order 10): 3541,2408 3727,2594 4384,2594 4669,2879 5127,2879 5132,2884 5201,2815 5201,2667 5248,2620 5248,2611 5378,2611 5443,2546 5443,1245 5365,1167 3606,1167 3545,1228
VCC on Top Layer "+5V" (solid, remove dead copper, pour order 8): 3544,2422 3562,2422 3734,2594 4388,2594 4667,2873 5133,2873 5195,2811 5195,2662 5198,2662 5262,2598 5391,2598 5442,2547 5442,1236 5438,1236 5367,1165 3615,1165 3544,1236

## Silkscreen, mask and mechanical layers (free items; w line width, h text height)
Outline:
  lines w10: 3482,2660 4368,2660 ; 3483,1110 3483,2664 ; 3485,1108.01 5518,1104 ; 4376,2662 4625,2911 ; 4630,2911 5249,2911 ; 5240,2666 5514,2666 ; 5244,2664 5244,2905 ; 5517,1101 5517,2665
Drill Drawing:
  lines w10: 1164.29,3498.5 1230.96,3498.5 1230.96,3565.17 1164.29,3565.17 1164.29,3498.5 ; 1164.29,3648.5 1197.62,3665.17 1230.96,3648.5 1214.29,3681.83 1230.96,3715.17 1197.62,3698.5 1164.29,3715.17 1180.96,3681.83 1164.29,3648.5
  lines w15: 1104.5,3453.5 14890.65,3453.5 ; 1104.5,3753.5 14890.65,3753.5 ; 1655.38,3303.5 1655.38,3903.5 ; 2195.24,3303.5 2195.24,3903.5 ; 3294.92,3303.5 3294.92,3903.5 ; 3800.79,3303.5 3800.79,3903.5 ; 4534.59,3303.5 4534.59,3903.5 ; 6034.14,3303.5 6034.14,3903.5 ; 6623.99,3303.5 6623.99,3903.5 ; 7369.79,3303.5 7369.79,3903.5 ; 8019.62,3303.5 8019.62,3903.5 ; 8873.38,3303.5 8873.38,3903.5 ; 10206.99,3303.5 10206.99,3903.5 ; 11540.6,3303.5 11540.6,3903.5 ; 12406.36,3303.5 12406.36,3903.5 ; 13763.96,3303.5 13763.96,3903.5 ; 1104.5,3303.5 14890.65,3303.5 14890.65,3903.5 1104.5,3903.5 1104.5,3303.5
  text "Symbol" at 1194.5,3798.5 h72
  text "Count" at 1700.38,3798.5 h72
  text "Hole Size" at 2240.24,3798.5 h72
  text "Plated" at 3339.92,3798.5 h72
  text "Hole Type" at 3845.79,3798.5 h72
  text "Drill Layer Pair" at 4579.59,3798.5 h72
  text "Via/Pad" at 6079.14,3798.5 h72
  text "Pad Shape" at 6668.99,3798.5 h72
  text "Template" at 7414.79,3798.5 h72
  text "Description" at 8064.62,3798.5 h72
  text "Hole Tolerance (+)" at 8918.38,3798.5 h72
  text "Hole Tolerance (-)" at 10251.99,3798.5 h72
  text "Hole Length" at 11585.6,3798.5 h72
  text "Routed Path Length" at 12451.36,3798.5 h72
  text "Hole Tolerance" at 13808.96,3798.5 h72
  text "46" at 1700.38,3648.5 h60
  text "12.00mil (0.305mm)" at 2240.24,3648.5 h60
  text "PTH" at 3339.92,3648.5 h60
  text "Round" at 3845.79,3648.5 h60
  text "Top Layer - Bottom Layer" at 4579.59,3648.5 h60
  text "Via" at 6079.14,3648.5 h60
  text "Rounded" at 6668.99,3648.5 h60
  text "v61h30" at 7414.79,3648.5 h60
  text "-" at 11585.6,3648.5 h60
  text "-" at 12451.36,3648.5 h60
  text "38" at 1700.38,3498.5 h60
  text "35.43mil (0.900mm)" at 2240.24,3498.5 h60
  text "PTH" at 3339.92,3498.5 h60
  text "Round" at 3845.79,3498.5 h60
  text "Top Layer - Bottom Layer" at 4579.59,3498.5 h60
  text "Pad" at 6079.14,3498.5 h60
  text "(Mixed)" at 6668.99,3498.5 h60
  text "(Mixed)" at 7414.79,3498.5 h60
  text "-" at 11585.6,3498.5 h60
  text "-" at 12451.36,3498.5 h60
  text "84 Total" at 1700.38,3348.5 h60

## Dimensions
3482,1106 to 3482,2660 on Drill Drawing
3485,1108.01 to 5510,1106 on Drill Drawing
5242,2911 to 5519,2666 on Drill Drawing
5242,2911 to 5246,2666 on Drill Drawing
4630,2911 to 5246,2907 on Drill Drawing
3482,2660 to 4372,2662 on Drill Drawing
4633,2917 to 4372,2662 on Drill Drawing

## Text inside footprints (layer, text, board x,y; h text height)
U5: Mechanical 1 "1" at 4665.94,1566.97 h10 r90; Mechanical 1 "20" at 4603.94,1557.97 h10 r90; Mechanical 1 "19" at 4534.94,1599.97 h10 r90; Mechanical 1 "12" at 4536.94,1771.97 h10 r90; Mechanical 1 "11" at 4610.15,1811 h10 r90; Mechanical 1 "10" at 4662.94,1807.97 h10 r90; Mechanical 1 "9" at 4731.94,1767.97 h10 r90; Mechanical 1 "2" at 4734.94,1603.97 h10 r90